# Altium PCB RPi_CWHUSKY_Target.PcbDoc (part 1 of 2)
Units mil, origin at the board's own origin, x right, y up, seen from the top; angles counter-clockwise.
Board outline 2623.51 x 2391.28 mil, 4 copper layers (Top Layer, Layer 1, Layer 2, Bottom Layer), stack 23.756 mil thick; 85 components, 89 nets, 390 pads, 172 vias.
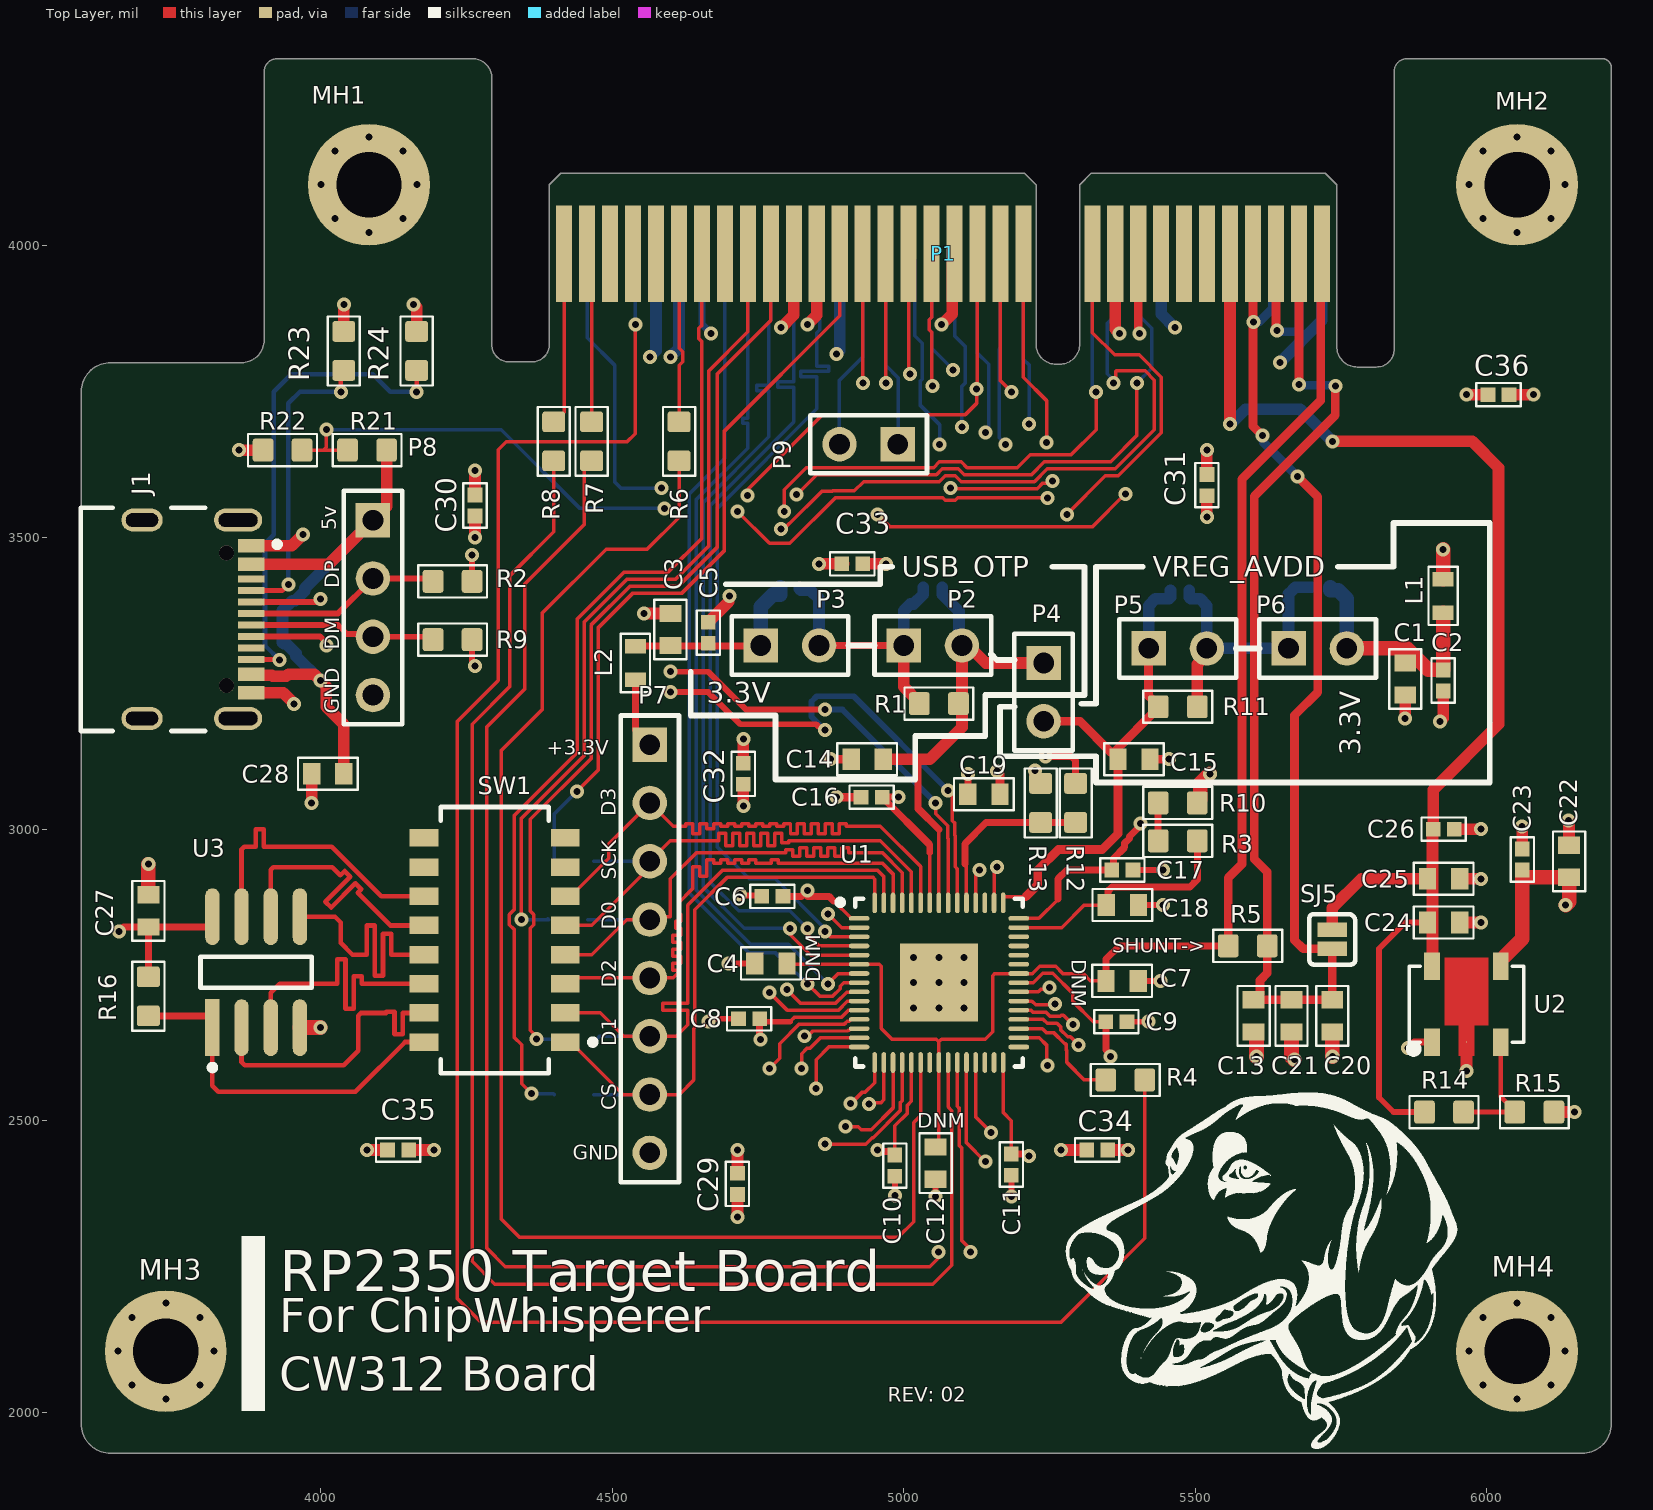
[diagram p0: Top Layer view]
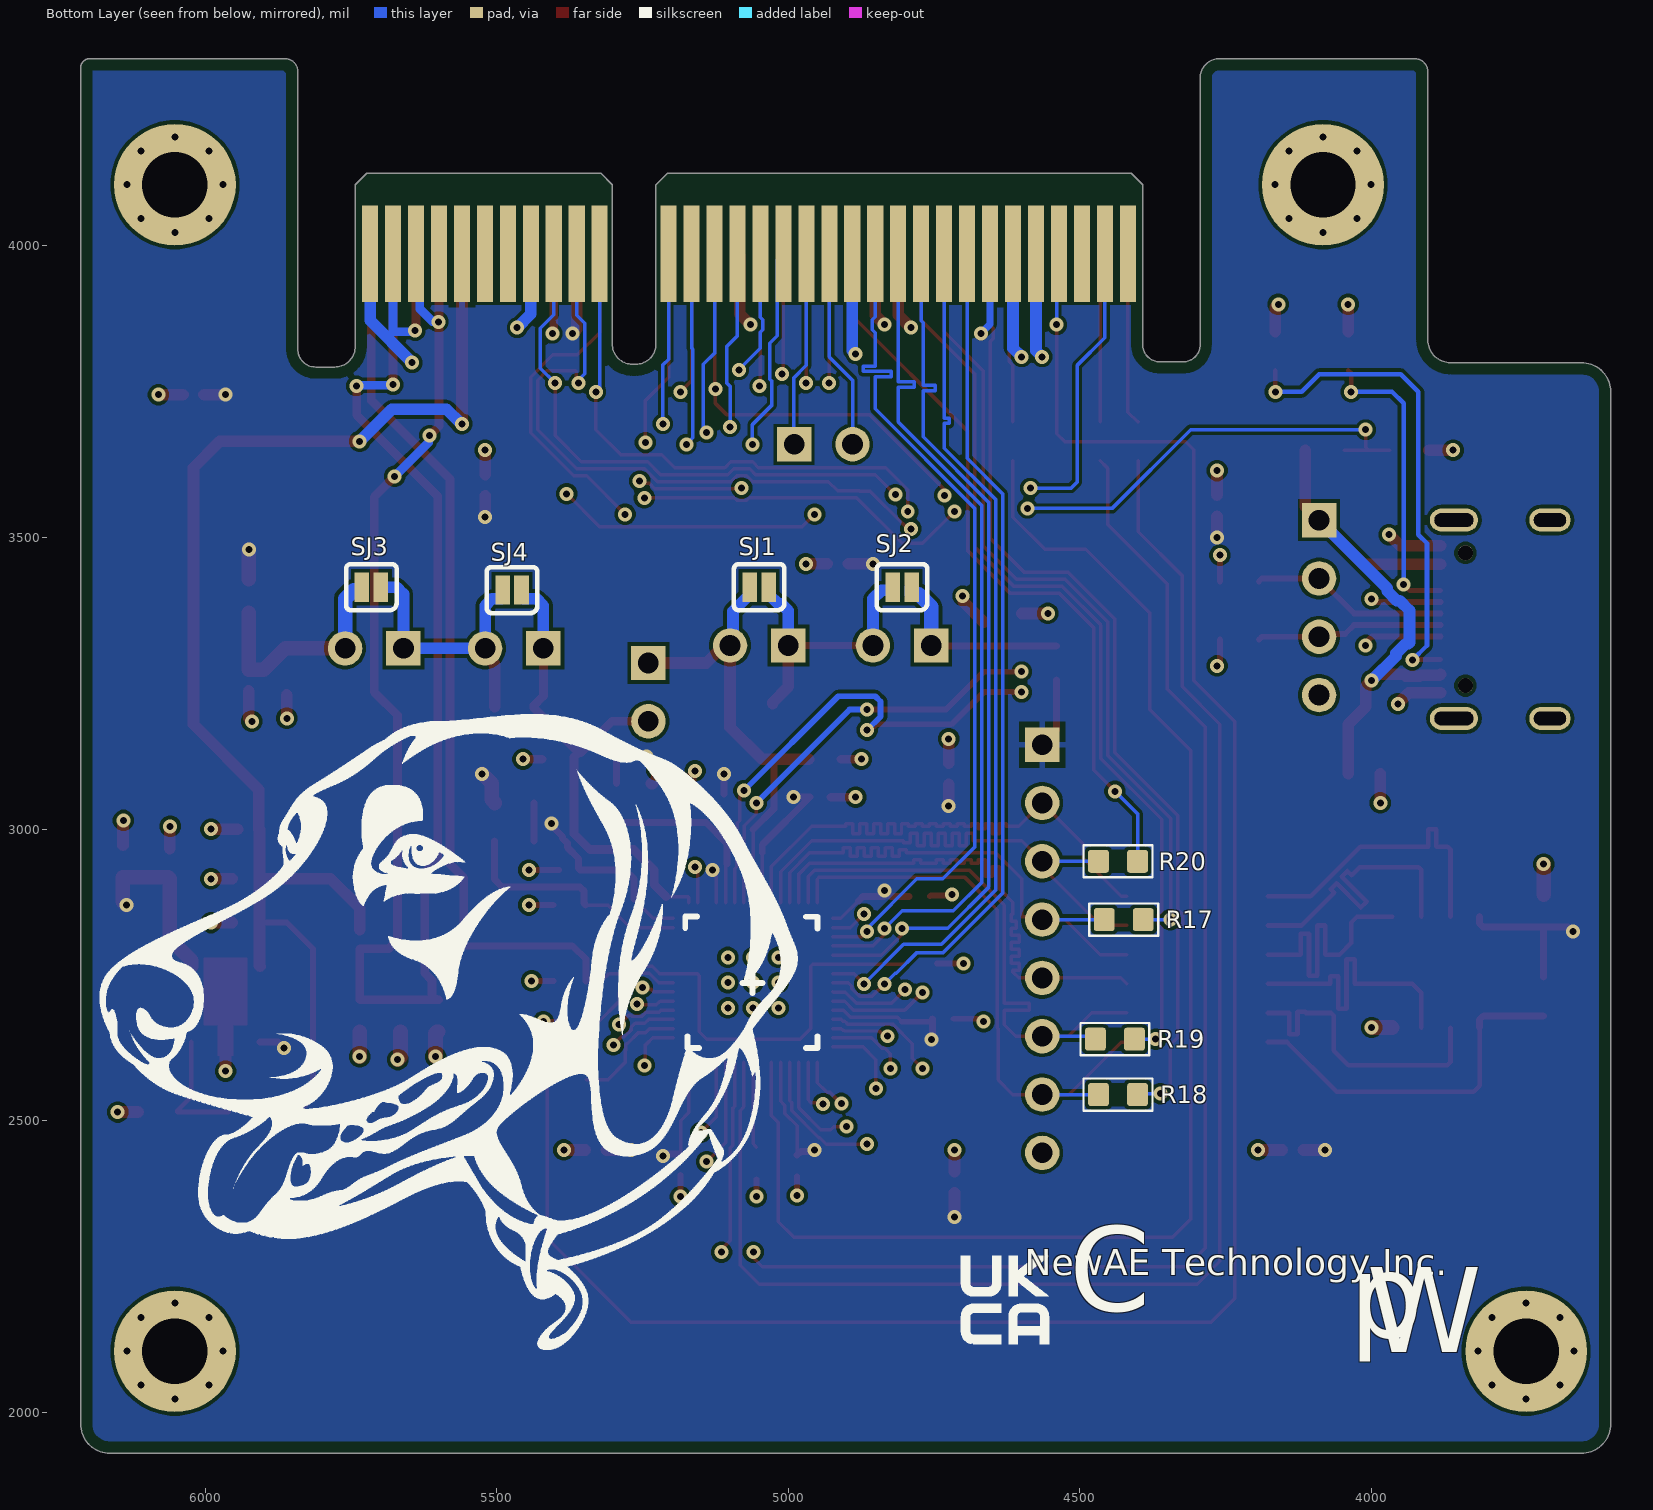
[diagram p1: Bottom Layer view, seen from below]
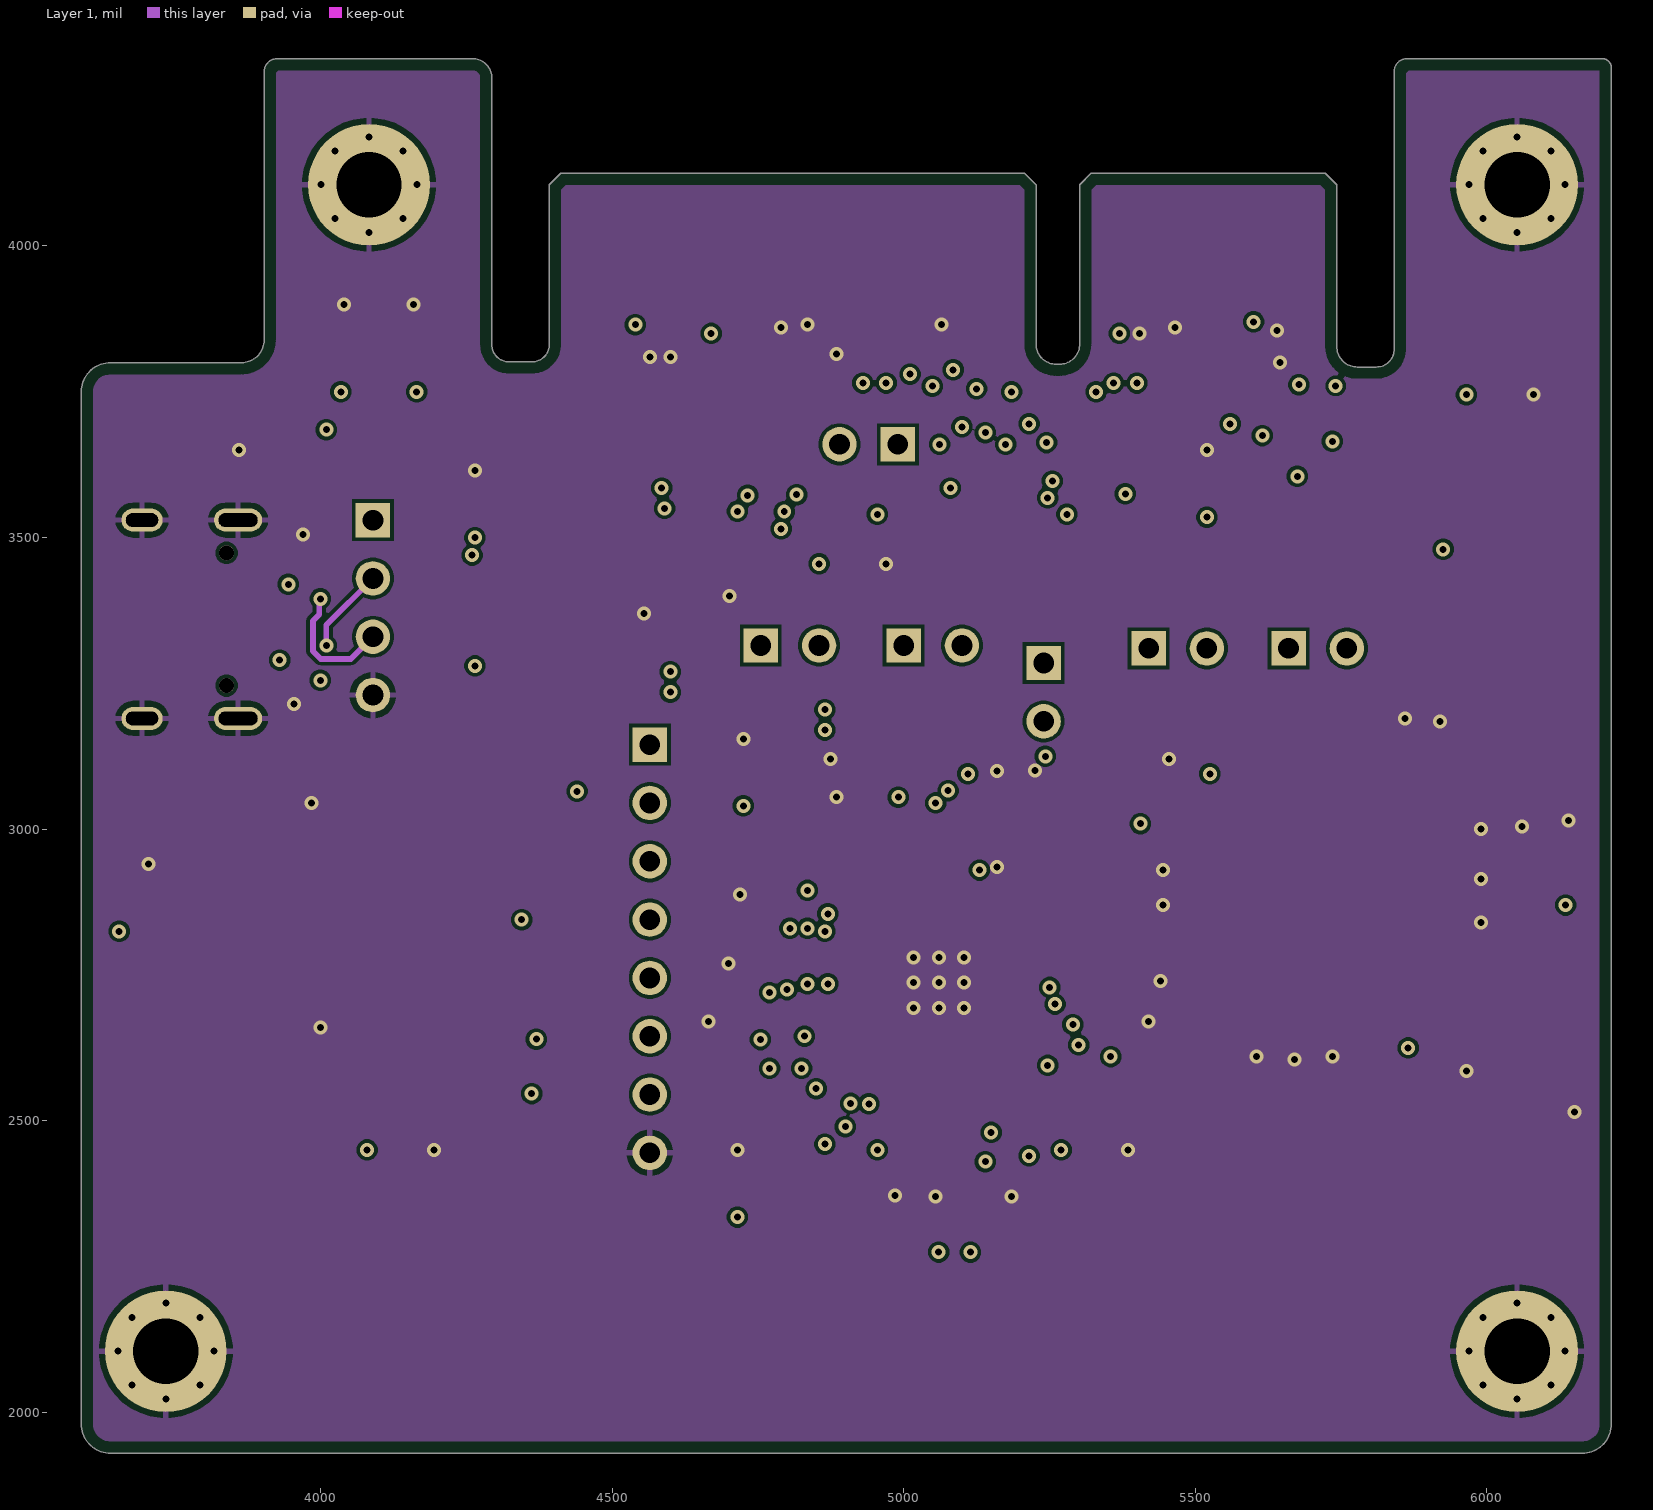
[diagram p2: Layer 1]
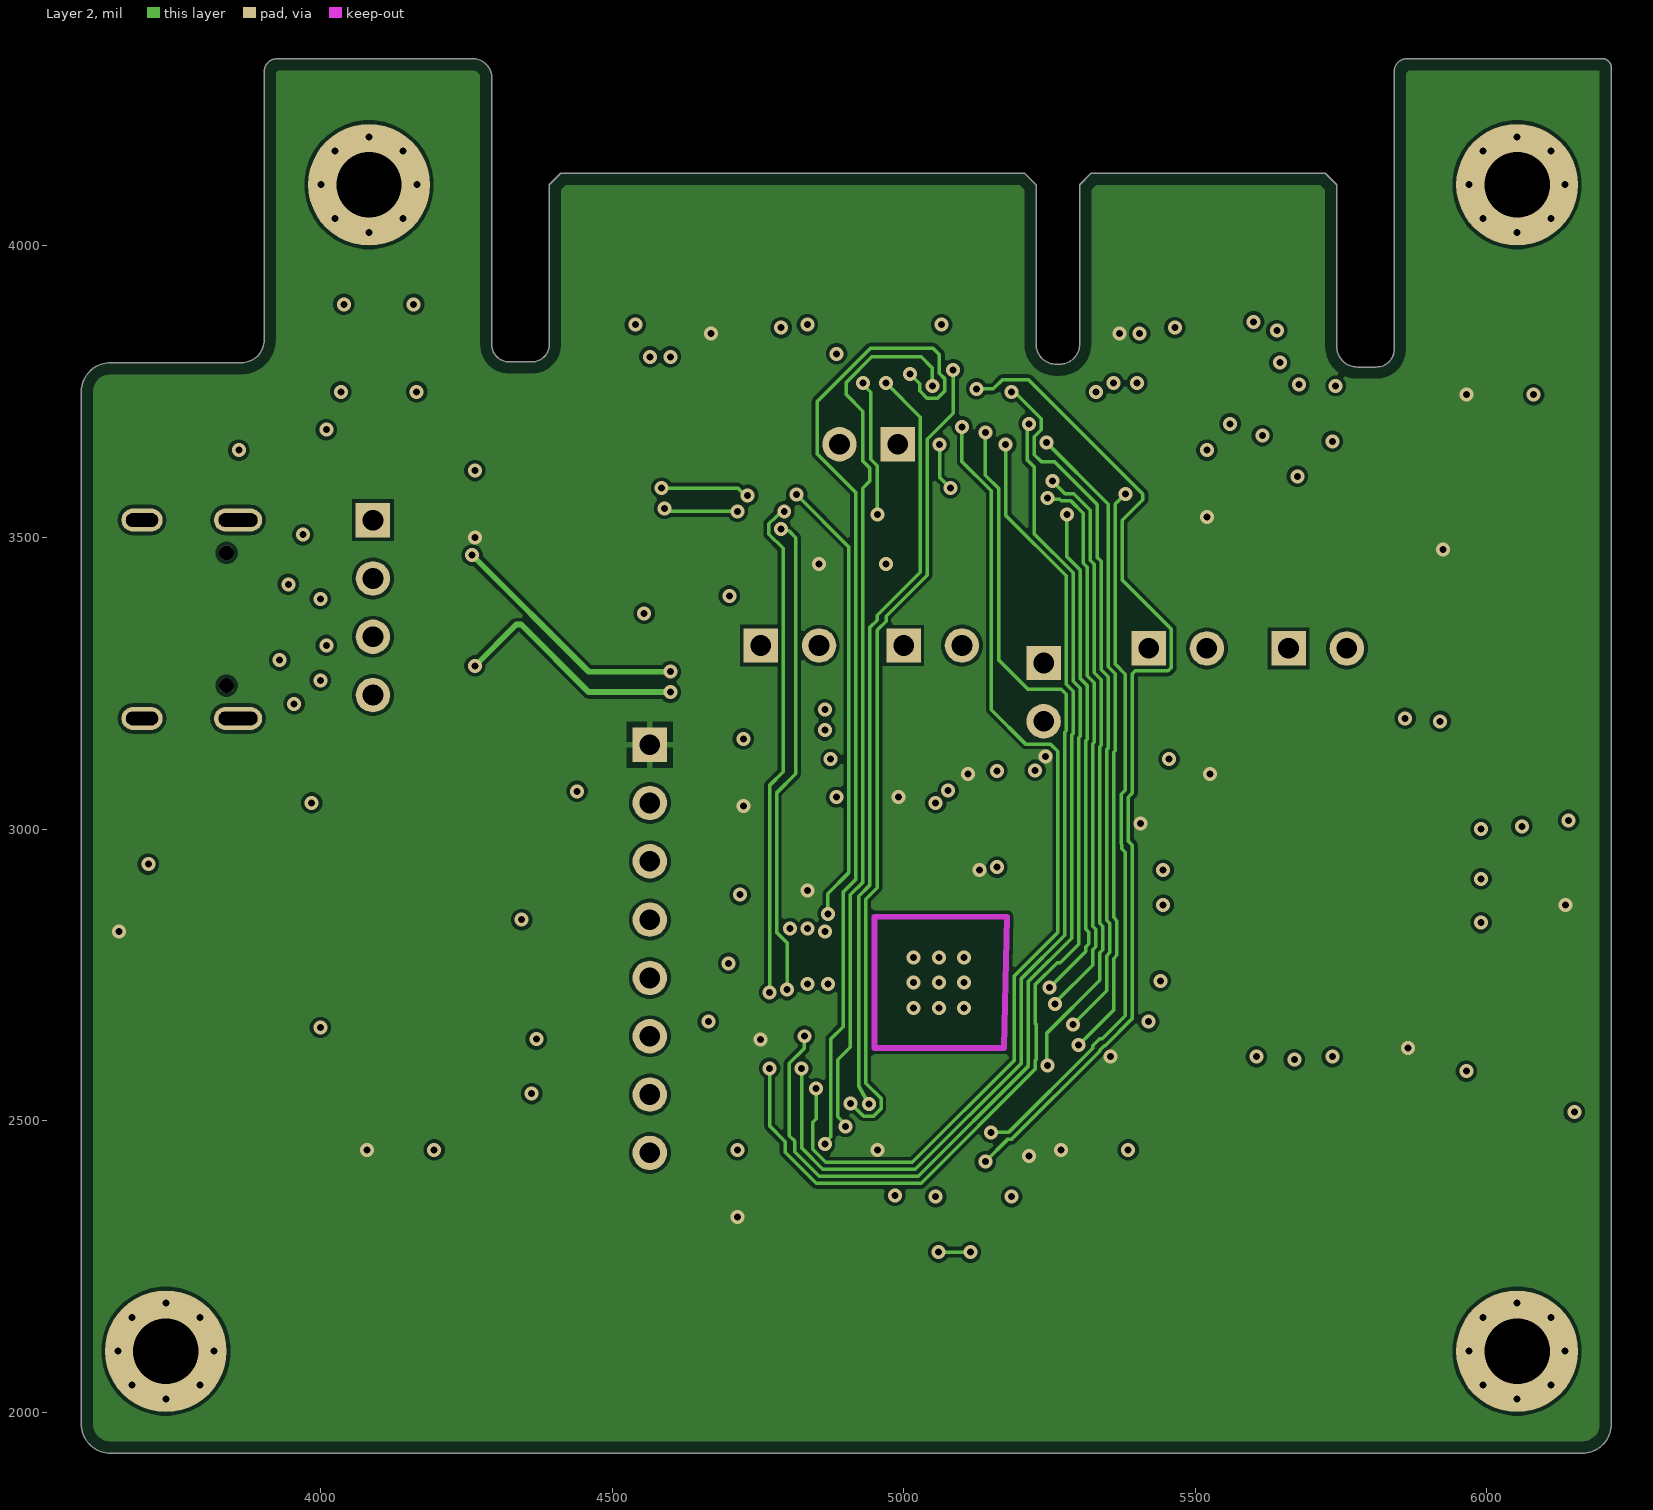
[diagram p3: Layer 2]
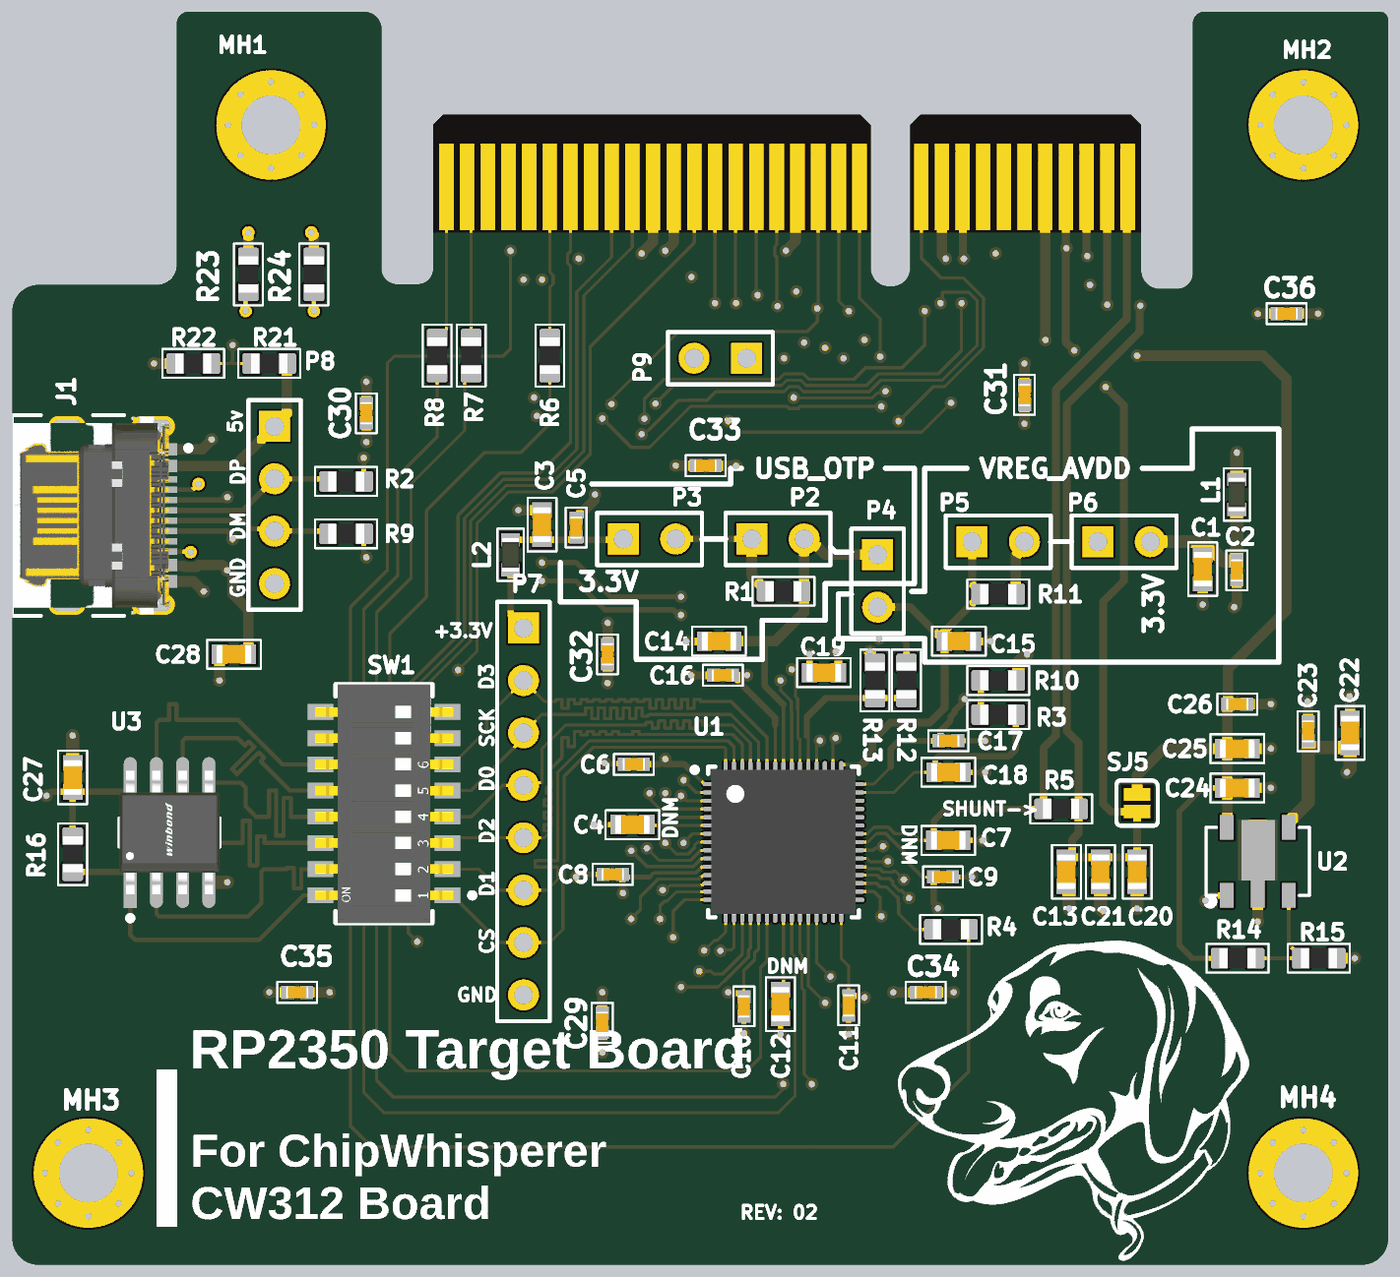
[diagram p5: 3D render of the assembled board from above, using the file's embedded part models]
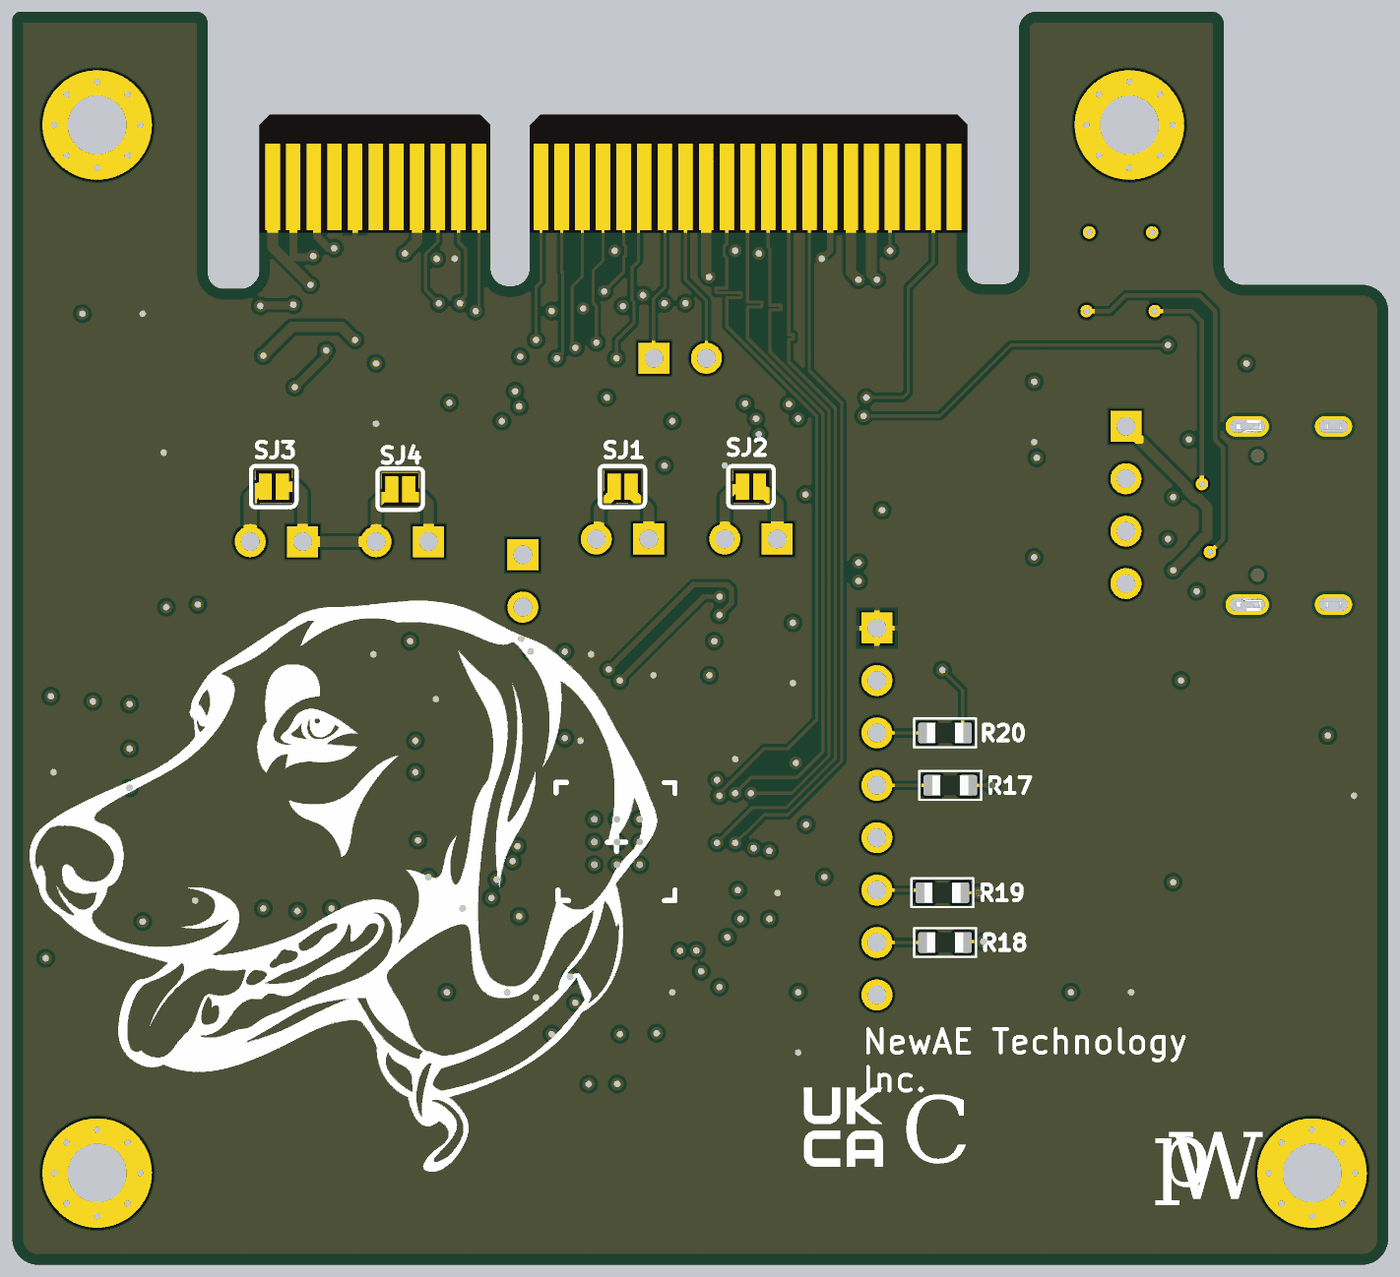
[diagram p6: 3D render of the assembled board from below, using the file's embedded part models]

## Layer stack, top to bottom
Top Solder: solder mask 0.4, Solder Resist, Dk 3.5
Top Layer: signal copper 1.4
Dielectric 2: prepreg 2.8, PP-006, Dk 4.1
Layer 1: signal copper 1.378
Dielectric 1: dielectric 12.6, FR-4, Dk 4.8
Layer 2: signal copper 1.378
Dielectric 3: prepreg 2.8, PP-006, Dk 4.1
Bottom Layer: signal copper 1.4
Bottom Solder: solder mask 0.4, Solder Resist, Dk 3.5

## Board outline
3590,1980 3590,3750 cw(c3640,3750) 3640,3800 3865,3800 ccw(c3865,3838.47) 3903.47,3838.47 3903.47,4298.64 cw(c3926.11,4298.64) 3926.11,4321.28 4260.75,4321.28 cw(c4260.75,4288.09) 4293.94,4288.09 4293.94,3830.52 ccw(c4323.02,3830.52) 4323.02,3801.44 4362.96,3801.44 ccw(c4362.96,3830.84) 4392.37,3830.84 4392.37,4105.09 4412.05,4124.78 5207.33,4124.78 5227.01,4105.09 5227.01,3831.47 ccw(c5261.04,3831.47) 5261.04,3797.44 5267.78,3797.44 ccw(c5267.78,3831.47) 5301.81,3831.47 5301.81,4105.09 5321.5,4124.78 5723.07,4124.78 5742.76,4105.09 5742.76,3827.46 ccw(c5777.78,3827.46) 5777.78,3792.44 5810.66,3792.44 ccw(c5810.66,3822.97) 5841.19,3822.97 5841.19,4299.35 cw(c5863.11,4299.35) 5863.11,4321.28 6197.76,4321.28 cw(c6197.76,4305.53) 6213.51,4305.53 6213.51,1980 cw(c6163.51,1980) 6163.51,1930 3640,1930 cw(c3640,1980)

## Design rules (kind name [scope] priority, off if disabled: settings)
BoardOutlineClearance Silk_to_Outline [(OnLayer('Top Overlay'))] p1: gap=0 ignorepadtopadclearanceinfootprint=FALSE
BoardOutlineClearance [All] p2: gap=20 ignorepadtopadclearanceinfootprint=FALSE except(5: Track-OutlineEdge Track-CavityEdge Track-CutoutEdge Track-SplitBarrior Track-SplitContinuation)
Clearance [All] p1: gap=6 ignorepadtopadclearanceinfootprint=FALSE except(0: Arc-Hole Track-Hole SMDPad-Hole THPad-Hole Via-Hole Fill-Hole Poly-Hole Region-Hole Text-Hole)
HoleSize [All] p1: absolutevalues=TRUE maxlimit=200 minlimit=1 maxpercent=80.000 minpercent=20.000
MatchedLengths MatchedLengths_beforedip [InNetClass('QSPIBeforeDIP')] p1: tolerance=10 checknetsindiffpair=FALSE checkdiffpairvsdiffpair=TRUE checkxsignals=TRUE checkothers=TRUE
MatchedLengths MatchedLengths_trace [InNetClass('trace')] p2: tolerance=10 checknetsindiffpair=FALSE checkdiffpairvsdiffpair=TRUE checkxsignals=TRUE checkothers=TRUE
MatchedLengths [InNetClass('QSpiAfterDIP')] p3: tolerance=50 checknetsindiffpair=FALSE checkdiffpairvsdiffpair=TRUE checkxsignals=TRUE checkothers=TRUE
MinimumSolderMaskSliver [All] p1: minsoldermaskwidth=5
PlaneConnect PlaneConnect_viaDirect [IsVia] p1: planeconnectstyle=Direct reliefexpansion=20 reliefentries=4 reliefconductorwidth=10 reliefairgap=10
PlaneConnect [All] p2: planeconnectstyle=Relief reliefexpansion=20 reliefentries=4 reliefconductorwidth=10 reliefairgap=10
PolygonConnect PolygonConnect_viaDirect [All vs isVia] p1: connectstyle=Direct reliefconductorwidth=10 reliefentries=4 polygonreliefangle="90 Angle" airgapwidth=10
PolygonConnect [All] p2: connectstyle=Relief reliefconductorwidth=10 reliefentries=4 polygonreliefangle="90 Angle" airgapwidth=10
RoutingVias [All] p1: holewidth=12 width=24 viastyle="Through Hole" minholewidth=12 minwidth=24 maxholewidth=28 maxwidth=50
SilkToSilkClearance [All] p1: silktosilkclearance=5
SilkToSolderMaskClearance [IsPad] p1: minsilkscreentomaskgap=5 clearancetoexposedcopper=TRUE
SolderMaskExpansion [All] p1: expansion=4 istentingtop=FALSE
Width [All] p1: maxlimit=100 minlimit=6 preferedwidth=8 midlayer1_maxwidth=10 midlayer2_maxwidth=10 minimp=50.000000 maximp=50.000000 favimp=50.000000
25 further rules are at their usual default settings.

## Classes and differential pairs
net class QSpiAfterDIP: NetR16_2 NetSW1_11 NetSW1_12 NetSW1_13 NetSW1_14 NetSW1_15
net class trace: TRACECLK TRACED0 TRACED1 TRACED2 TRACED3
net class QSPIBeforeDIP: QSPI_SCLK QSPI_SD0 QSPI_SD1 QSPI_SD2 QSPI_SD3 QSPI_SS
component class RP2350_QSPI: C27 P7 R16 R17 R18 R19 R20 SW1 U3
component class RP2350_Power: C22 C23 C24 C25 C26 C28 C29 C30 C31 C32 C33 C34 C35 C36 J1 P8 R14 R15 R21 R22 R23 R24 U2
component class RP2350_MCU: C1 C2 C3 C4 C5 C6 C7 C8 C9 C10 C11 C12 C14 C15 C16 C17 C18 C19 L1 L2 P2 P3 P4 P5 P6 R1 R2 R3 R9 R10 R11 R12 R13 SJ1 SJ2 SJ3 SJ4 U1
component class RP2350_CWHusky: C13 C20 C21 MH1 MH2 MH3 MH4 P1 P9 R4 R5 R6 R7 R8 SJ5

## Components (designator, comment, footprint, x,y, rotation, side; value= is the part's Value field where it differs from the comment)
C1 "2u2" CAPC0603_M 5860,3257.56 r270 top
C2 "100n" CAPC0402_M 5925,3255 r270 top
C3 "2u2" CAPC0603_M 4600,3342.44 r90 top
C4 "DNM" CAPC0603_M 4772.44,2770 r180 top
C5 "100n" CAPC0402_M 4665,3336.89 r90 top
C6 "100n" CAPC0402_M 4775,2885 r180 top
C7 "DNM" CAPC0603_M 5374.76,2740 r0 top
C8 "100n" CAPC0402_M 4735,2675 r180 top
C9 "100n" CAPC0402_M 5364.76,2670 r0 top
C10 "100n" CAPC0402_M 4985,2423.11 r270 top
C11 "100n" CAPC0402_M 5184.76,2425 r270 top
C12 "DNM" CAPC0603_M 5054.76,2427.44 r270 top
C13 "2u2" CAPC0603_M 5600,2680 r270 top
C14 "DNM" CAPC0603_M 4937.56,3120 r180 top
C15 "DNM" CAPC0603_M 5395,3120 r0 top
C16 "100n" CAPC0402_M 4945,3055 r180 top
C17 "100n" CAPC0402_M 5375,2930 r0 top
C18 "2u2" CAPC0603_M 5375,2870 r0 top
C19 "2u2" CAPC0603_M 5137.56,3060 r0 top
C20 "100n" CAPC0603_M 5735,2680 r270 top
C21 "100n" CAPC0603_M 5665,2680 r270 top
C22 "2u2" CAPC0603_M 6140.94,2945 r90 top
C23 "100n" CAPC0402_M 6060.94,2948.11 r90 top
C24 "2u2" CAPC0603_M 5925.94,2840 r0 top
C25 "2u2" CAPC0603_M 5925.94,2915 r0 top
C26 "100n" CAPC0402_M 5925.94,3000 r0 top
C27 "100n" CAPC0603_M 3705,2860 r90 top
C28 "2u2" CAPC0603_M 4012.56,3095 r180 top
C29 "100n" CAPC0402_M 4715,2391.89 r90 top
C30 "100n" CAPC0402_M 4265,3555 r90 top
C31 "100n" CAPC0402_M 5520,3590 r90 top
C32 "100n" CAPC0402_M 4725,3095 r90 top
C33 "100n" CAPC0402_M 4911.89,3455 r0 top
C34 "100n" CAPC0402_M 5331.89,2450 r0 top
C35 "100n" CAPC0402_M 4133.11,2450 r0 top
C36 "100n" CAPC0402_M 6020,3745 r0 top
J1 "USB4105-GF-A" FP-USB4105-GF-A-MFG 3740,3360 r270 top
L1 "1k @ 1Mhz" IND_0603 5925,3400 r90 top
L2 "1k @ 1Mhz" IND_0603 4540,3285 r90 top
MH1 "4-40 MH, Tight Fit" MOUNT_#4_TIGHT 4083.31,4105.09 r0 top
MH2 "4-40 MH, Tight Fit" MOUNT_#4_TIGHT 6051.81,4105.09 r0 top
MH3 "4-40 MH, Tight Fit" MOUNT_#4_TIGHT 3735,2105 r0 top
MH4 "4-40 MH, Tight Fit" MOUNT_#4_TIGHT 6051.81,2105 r0 top
P1 "PCIeX4-GF-2D-1000-1K-O64" PCIeX4-GF-2D-1000-1K-O64 5343.15,3986.98 r180 top
P2 "Header 2" HDR1X2 5000,3315 r0 top
P3 "Header 2" HDR1X2 4755,3315 r0 top
P4 "Header 2" HDR1X2 5240,3285 r270 top
P5 "Header 2" HDR1X2 5420,3310 r0 top
P6 "Header 2" HDR1X2 5660,3310 r0 top
P7 "Header 8" HDR1X8 4564.76,3145 r270 top
P8 "Header 4" HDR1X4 4090,3530 r270 top
P9 "Header 2" HDR1X2 4990,3660 r180 top
R1 "10R" RESC1608X55N 5060.51,3215.26 r0 top
R2 "27R" RESC1608X55N 4226.54,3425 r180 top
R3 "1R" RESC1608X55N 5470,2980 r180 top value=10R
R4 "10R" RESC1608X55N 5380,2570 r180 top
R5 "10R" RESC1608X55N 5590,2800 r180 top
R6 "10R" RESC1608X55N 4615,3665 r90 top
R7 "100R" RESC1608X55N 4465,3665 r90 top
R8 "100R" RESC1608X55N 4400,3665 r90 top
R9 "27R" RESC1608X55N 4226.54,3325 r180 top
R10 "200R" RESC1608X55N 5470,3045 r180 top
R11 "10R" RESC1608X55N 5470,3210 r0 top
R12 "5k6" RESC1608X55N 5295,3045 r270 top
R13 "3k3" RESC1608X55N 5235,3045 r90 top
R14 "5k6" RESC1608X55N 5926.54,2515 r0 top
R15 "15k" RESC1608X55N 6081.54,2515 r0 top
R16 "1k" RESC1608X55N 3705,2713.46 r270 top
R17 "DNM RCHIP" RESC1608X55N 4425,2845 r180 bottom
R18 "DNM RCHIP" RESC1608X55N 4434.76,2545 r0 bottom
R19 "DNM RCHIP" RESC1608X55N 4440,2640 r180 bottom
R20 "DNM RCHIP" RESC1608X55N 4434.76,2945 r0 bottom
R21 "5k6" RESC1608X55N 4080,3650 r180 top
R22 "10k" RESC1608X55N 3935,3650 r180 top
R23 "5k1" RESC1608X55N 4040,3820 r90 top
R24 "5k1" RESC1608X55N 4165,3820 r90 top
SJ1 "NO" SJ_2S_NO 5050,3415 r0 bottom
SJ2 "NO" SJ_2S_NO 4805,3415 r0 bottom
SJ3 "NO" SJ_2S_NO 5715,3415 r0 bottom
SJ4 "NO" SJ_2S_NO 5473.78,3410 r0 bottom
SJ5 "NO" SJ_2S_NO 5735,2811.22 r270 top
SW1 "A6H-8101-PM" FP-A6H-8101-PM-MFG 4298.7,2810 r90 top
U1 "AMETHYST 7x7" QFN60P700X700X85_HS-61M 5060.51,2736.81 r0 top
U2 "AP7361C-Y5-13" SOT89-5 5905.94,2635 r0 top
U3 "W25Q16JVSNIQ TR" FP-W25Q16JVSNIQ_TR-IPC_A 3889.76,2754.88 r90 top

## Footprints (in the part's own frame and the unit in brackets; to place one, negate y for a bottom-side part, rotate by r counter-clockwise, add the part's x,y. Pads: shape width x height; smd on the part's side, far side on the other; paste and mask are expansions set on the pad)
CAPC0402_M [mm] "Chip Capacitor, 2-Leads, Body 0402, IPC Medium Density"
  rect 0.64x0.64 smd mask+0.06: 1(-0.46,0) 2(0.46,0)
  silkscreen extent -0.97,-0.51 0.97,0.51, body extent -0.55,-0.3 0.55,0.3, height 0.6
CAPC0603_M [mm]
  rect 0.75x0.95 smd: 1(-0.7,0) 2(0.7,0)
  silkscreen extent -1.3,-0.7 1.3,0.7, body extent -0.85,-0.45 0.85,0.45, height 0.9
FP-A6H-8101-PM-MFG [mm]
  rect 0.76x1.25 smd paste+0 mask+0: 1(-4.445,-3.075) 2(-3.175,-3.075) 3(-1.905,-3.075) 4(-0.635,-3.075) 5(0.635,-3.075) 6(1.905,-3.075) 7(3.175,-3.075) 8(4.445,-3.075) 9(4.445,3.075) 10(3.175,3.075) 11(1.905,3.075) 12(0.635,3.075) 13(-0.635,3.075) 14(-1.905,3.075) 15(-3.175,3.075) 16(-4.445,3.075)
  silkscreen extent -5.79,-4.4 5.79,2.35, body extent -5.89,-3.8 5.89,3.8, height 0.25
FP-USB4105-GF-A-MFG [mm]
  rrect100% 1x2.1 hole 1.7 slot 0.6 at 0 deg paste-2539.97 mask+0: 1(-4.32,3.015) 2(4.32,3.015)
  rrect100% 1x1.8 hole 1.4 slot 0.6 at 0 deg paste-2539.97 mask+0: 3(-4.32,-1.165) 4(4.32,-1.165)
  rect 0.6x1.15 smd paste+0 mask+0: A1-B12(-3.2,3.59) A4-B9(-2.4,3.59) B1-A12(3.2,3.59) B4-A9(2.4,3.59)
  rect 0.3x1.15 smd paste+0 mask+0: A5(-1.25,3.59) A6(-0.25,3.59) A7(0.25,3.59) A8(1.25,3.59) B5(1.75,3.59) B6(0.75,3.59) B7(-0.75,3.59) B8(-1.75,3.59)
  round 0.65 hole 0.65 unplated paste-2539.97 mask+0: ""(-2.89,2.515) ""(2.89,2.515)
  silkscreen extent -4.86,-3.84 4.86,4.84, body extent -4.96,-3.94 4.96,4.27, height 0.25
FP-W25Q16JVSNIQ_TR-IPC_A [mil]
  rect 97.4x24.54 smd paste+0 mask+0: 1(-95.12,75)
  rrect100% 97.4x24.54 smd paste+0 mask+0: 2(-95.12,25) 3(-95.12,-25) 4(-95.12,-75) 5(95.12,-75) 6(95.12,-25) 7(95.12,25) 8(95.12,75)
  silkscreen extent -168,-95 27,95, body extent -164,-115 164,115, height 10
HDR1X2 [mm] "Connector; Header; 2 Position"
  rect 1.5x1.5 hole 0.9: 1(0,0)
  round 1.5 hole 0.9: 2(2.54,0)
  silkscreen extent -1.27,-1.27 3.81,1.27
HDR1X4 [mm] "Connector; Header; 4 Position"
  rect 1.5x1.5 hole 0.9: 1(0,0)
  round 1.5 hole 0.9: 2(2.54,0) 3(5.08,0) 4(7.62,0)
  silkscreen extent -1.27,-1.27 8.89,1.27
HDR1X8 [mm] "Connector; Header; 8 Position"
  rect 1.5x1.5 hole 0.9: 1(0,0)
  round 1.5 hole 0.9: 2(2.54,0) 3(5.08,0) 4(7.62,0) 5(10.16,0) 6(12.7,0) 7(15.24,0) 8(17.78,0)
  silkscreen extent -1.27,-1.27 19.05,1.27
IND_0603 [mm] "Chip Inductor, 2-Leads, Body 1.60x0.80mm, IPC Medium Density"
  rect 0.64x0.92 smd: 1(-0.73,0) 2(0.73,0)
  Top Layer pour cut-out: -0.686,0.457 0.838,0.457 0.838,-0.457 -0.686,-0.457
  silkscreen extent -1.27,-0.64 1.27,0.64, body extent -0.82,-0.43 0.82,0.43, height 0.9
MOUNT_#4_TIGHT [mil]
  round 14 hole 12: 1(-82.21,0) 1(-58.13,-58.13) 1(-58.13,58.13) 1(0,-82.21) 1(0,82.21) 1(58.13,-58.13) 1(58.13,58.13) 1(82.21,0)
  round 208.66 hole 112.2: 1(0,0)
PCIeX4-GF-2D-1000-1K-O64 [mm] "Golden finger, PCIeX4, Dual, Opposite, Pitch 1mm, 64-Position"
  rect 0.7x4.2 smd far side paste-1: A1(-9.5,0) A2(-8.5,0) A3(-7.5,0) A4(-6.5,0) A5(-5.5,0) A6(-4.5,0) A7(-3.5,0) A8(-2.5,0) A9(-1.5,0) A10(-0.5,0) A11(0.5,0) A12(3.5,0) A13(4.5,0) A14(5.5,0) A15(6.5,0) A16(7.5,0) A17(8.5,0) A18(9.5,0) A19(10.5,0) A20(11.5,0) A21(12.5,0) A22(13.5,0) A23(14.5,0) A24(15.5,0) A25(16.5,0) A26(17.5,0) A27(18.5,0) A28(19.5,0) A29(20.5,0) A30(21.5,0) A31(22.5,0) A32(23.5,0)
  rect 0.7x4.2 smd paste-1: B1(-9.5,0) B2(-8.5,0) B3(-7.5,0) B4(-6.5,0) B5(-5.5,0) B6(-4.5,0) B7(-3.5,0) B8(-2.5,0) B9(-1.5,0) B10(-0.5,0) B11(0.5,0) B12(3.5,0) B13(4.5,0) B14(5.5,0) B15(6.5,0) B16(7.5,0) B17(8.5,0) B18(9.5,0) B19(10.5,0) B20(11.5,0) B21(12.5,0) B22(13.5,0) B23(14.5,0) B24(15.5,0) B25(16.5,0) B26(17.5,0) B27(18.5,0) B28(19.5,0) B29(20.5,0) B30(21.5,0) B31(22.5,0) B32(23.5,0)
QFN60P700X700X85_HS-61M [mm] "QFN, 60-Leads, Body 7.00x7.00mm, Pitch 0.40mm, Thermal Pad 3.40x3.40mm, IPC Low Density"
  oval 0.9x0.2 smd: 1(-3.475,2.8) 2(-3.475,2.4) 3(-3.475,2) 4(-3.475,1.6) 5(-3.475,1.2) 6(-3.475,0.8) 7(-3.475,0.4) 8(-3.475,0) 9(-3.475,-0.4) 10(-3.475,-0.8) 11(-3.475,-1.2) 12(-3.475,-1.6) 13(-3.475,-2) 14(-3.475,-2.4) 15(-3.475,-2.8) 31(3.475,-2.8) 32(3.475,-2.4) 33(3.475,-2) 34(3.475,-1.6) 35(3.475,-1.2) 36(3.475,-0.8) 37(3.475,-0.4) 38(3.475,0) 39(3.475,0.4) 40(3.475,0.8) 41(3.475,1.2) 42(3.475,1.6) 43(3.475,2) 44(3.475,2.4) 45(3.475,2.8)
  oval 0.2x0.9 smd: 16(-2.8,-3.475) 17(-2.4,-3.475) 18(-2,-3.475) 19(-1.6,-3.475) 20(-1.2,-3.475) 21(-0.8,-3.475) 22(-0.4,-3.475) 23(0,-3.475) 24(0.4,-3.475) 25(0.8,-3.475) 26(1.2,-3.475) 27(1.6,-3.475) 28(2,-3.475) 29(2.4,-3.475) 30(2.8,-3.475) 46(2.8,3.475) 47(2.4,3.475) 48(2,3.475) 49(1.6,3.475) 50(1.2,3.475) 51(0.8,3.475) 52(0.4,3.475) 53(0,3.475) 54(-0.4,3.475) 55(-0.8,3.475) 56(-1.2,3.475) 57(-1.6,3.475) 58(-2,3.475) 59(-2.4,3.475) 60(-2.8,3.475)
  rect 3.4x3.4 smd: 61(0,0)
  silkscreen extent -4.42,-3.65 3.65,3.65, body extent -3.5,-3.5 3.5,3.5, height 0.85
RESC1608X55N [mm] "Chip Resistor, Body 1.6x0.8mm, EIA 0603, IPC Medium Density"
  round 0.254 on Mech15: 0(0,0)
  rrect25% 0.9x1 smd: 1(-0.85,0) 2(0.85,0)
  Top Layer pour cut-out: -0.6,0.5 0.6,0.5 0.6,-0.5 -0.6,-0.5
  silkscreen extent -1.5,-0.7 1.5,0.7, body extent -0.87,-0.47 0.88,0.48, height 0.54
SJ_2S_NO [mil] "Solder Jumper, open (no paste)"
  rect 25x50 smd paste-393.7: 1(-16.22,0) 2(16.22,0)
  silkscreen extent -43,-39 43,39
SOT89-5 [mm]
  rect 0.68x1.2 smd: 1(0,0) 3(3,0) 4(3,3.3) 5(0,3.3)
  round 0.025 smd: 2(1.5,0)
  Top Layer region: 0.55,0.725 2.45,0.725 2.45,3.675 0.55,3.675
  Top Layer region: 1.16,-0.6 1.16,3.65 1.84,3.65 1.84,-0.6
  silkscreen extent -1,-0.44 4,3.3

## Part data
C1 C3 C13 C18 C19 C22 C24 C25 C28: library part CCHIP-2u2-0603, "2u2, 0603", Case-EIA=0603, Case-Metric=1608, Manufacture 1=Samsung, Manufacture Part Number 1=CL10B225KP8NNNC, Rated Voltage=10VDC, Supplier Part Number 1=1276-1134-1-ND, Component Group=Capacitor, Component Type=Standard, Mounting Technology=SMT, Part Number=CCHIP-2u2-0603, Pin Count=2, Supplier 1=Digi-Key
C2 C5 C6 C8 C9 C10 C11 C16 C17 C23 C26 C29 C30 C31 C32 C33 C34 C35 C36: library part CCHIP-100n-0402, "100n, 0402", Case-EIA=0402, Manufacture Part Number 1=CGA2B3X7R1V104K050BB, Supplier Part Number 1=445-6901-1-ND, Component Group=Capacitor, Component Type=Standard, Mounting Technology=SMT, Part Number=CCHIP-100n-0402, Pin Count=2, Supplier 1=Digi-Key
C4 C7 C12 C14 C15: library part CCHIP-DNM-0603, "DNM, 0603", Case-EIA=0603, Component Group=Capacitor, Component Type=Standard, Mounting Technology=SMT, Part Number=CCHIP-DNM-0603, Pin Count=2
C20 C21 C27: library part CCHIP-100n-0603, "100n, 0603", Case-EIA=0603, Case-Metric=1608, Manufacture 1=Kemet, Manufacture Part Number 1=C0603C104K5RACTU, Rated Voltage=50VDC, Supplier Part Number 1=399-5089-2-ND, Component Group=Capacitor, Component Type=Standard, Mounting Technology=SMT, Part Number=CCHIP-100n-0603, Pin Count=2, Supplier 1=Digi-Key
J1: library part CMP-245163-000001-1, "CONN RCPT USB2.0 TYPEC 5A", Current Rating=5/6.25/1.25/0.25A, Manufacturer=GCT, Package=0, Temperature="-40°C to +85°C", Temperature Range High=+85°C, Temperature Range Low=-40°C, Voltage Rating=20V, Automotive=No, Category=Conn, ComponentLink2Description=Datasheet, ComponentLink2URL=https://gct.co/files/drawings/usb4105.pdf, Conn Orientation="Right Angle", Contact Material=Gold,Nickel, Device Class L1=Connectors, Device Class L2="USB Connectors", Device Class L3=unset, Digikey Description="CONN RCPT USB2.0 TYPEC 5A", Height=3.46mm, Is Female=yes, Lead Free=Yes, Manufacturer Part Number=USB4105-GF-A, Number of Contacts=16, Octopart=https://octopart.com/usb4105-gf-a-gct-106627878, RoHS=TRUE, Usb Standard="USB 2.0"
L1 L2: library part FBCHIP-1k-0603, "Ferrite Beads HI CUR CHIP BD 0603 1000OHMS 25%", Manufacture 1="Taiyo Yuden", Manufacture Part Number 1="FBMH1608HM102-T / FBMH1608HM102-T / FBMH1608HM102-T / FBMH1608HM102-T", Supplier Part Number 1=963-FBMH1608HM102-T, Component Group=Inductor, Component Type=Standard, Mounting Technology=SMT, Part Number=FBCHIP-1k-0603, Pin Count=2, PP Material Stack=0, PP Rotation=0, RoHS=Yes, Supplier 1=Mouser
MH1 MH2 MH3 MH4: library part MOUNT_#4_TIGHT, "Machine screw 4-40 Mounting Hole", Component Group=Mechanical, Component Type=Mechanical, Part Number=MOUNT_#4_TIGHT, Pin Count=1, PP Material Stack=0, PP Rotation=0
P1: library part CMP-0001-00031-2, "Golden finger, PCIeX4, Dual, Opposite, Pitch 1mm, 64-Position", ClassName="Edge Connector", Datasheet Version="rev2.0, Apr-2007", Mating Connector=Molex-87715-9106, Package Reference=PCIeX4-GF-2D-1000-1K-O64, Publisher=Altium
P2 P3 P4 P5 P6 P9: "Header, 2-Pin", LatestRevisionDate=17-Jul-2002, LatestRevisionNote="Re-released for DXP Platform.", Publisher="Altium Limited"
P7: "Header, 8-Pin", LatestRevisionDate=17-Jul-2002, LatestRevisionNote="Re-released for DXP Platform.", Publisher="Altium Limited"
P8: "Header, 4-Pin", LatestRevisionDate=17-Jul-2002, LatestRevisionNote="Re-released for DXP Platform.", Publisher="Altium Limited"
R1 R4 R5 R6 R11: library part RCHIP-10R-0603, "10R res, 0603, 1%, 1/10W", Case-EIA=0603, Case-Metric=1608, Manufacture 1=Yageo, Manufacture Part Number 1=RC0603FR-0710RL, Rated Power=0.1W, Rated Voltage=75VDC, Supplier Part Number 1=311-10.0HRCT-ND, Temperature Range="-55C to 155C", Tolerance=1%, Component Group=Resistor, Component Type=Standard, Mounting Technology=SMT, Part Number=RCHIP-10R-0603, Pin Count=2, Supplier 1=Digi-Key
R2 R9: library part RCHIP-27R-0603, "27R res, 0603, 1%, 1/10W", Case-EIA=0603, Case-Metric=1608, Manufacture 1=Yageo, Manufacture Part Number 1=RC0603FR-0727RL, Rated Power=0.1W, Rated Voltage=75VDC, Supplier Part Number 1=311-27.0HRCT-ND, Temperature Range="-55C to 155C", Tolerance=1%, Component Group=Resistor, Component Type=Standard, Mounting Technology=SMT, Part Number=RCHIP-27R-0603, Pin Count=2, Supplier 1=Digi-Key
R3: library part RCHIP-10R-0603, "1R res, 0603, 1%, 1/10W", Case-EIA=0603, Case-Metric=1608, Manufacture 1=Yageo, Manufacture Part Number 1=RC0603FR-0710RL, Rated Power=0.1W, Rated Voltage=75VDC, Supplier Part Number 1=311-10.0HRCT-ND, Temperature Range="-55C to 155C", Tolerance=1%, Component Group=Resistor, Component Type=Standard, Mounting Technology=SMT, Part Number=RCHIP-10R-0603, Pin Count=2, Supplier 1=Digi-Key
R7 R8: library part RCHIP-100R-0603, "100R res, 0603, 1%, 1/10W", Case-EIA=0603, Case-Metric=1608, Manufacture 1=Yageo, Manufacture Part Number 1=RC0603FR-07100RL, Rated Power=0.1W, Rated Voltage=75VDC, Supplier Part Number 1=311-100HRCT-ND, Temperature Range="-55C to 155C", Tolerance=1%, Component Group=Resistor, Component Type=Standard, Mounting Technology=SMT, Part Number=RCHIP-100R-0603, Pin Count=2, Supplier 1=Digi-Key
R10: library part RCHIP-200R-0603, "200R res, 0603, 1%, 1/10W", Case-EIA=0603, Case-Metric=1608, Manufacture 1=Yageo, Manufacture Part Number 1=RC0603FR-07200RL, Rated Power=0.1W, Rated Voltage=75VDC, Supplier Part Number 1=311-200HRCT-ND, Temperature Range="-55C to 155C", Tolerance=1%, Component Group=Resistor, Component Type=Standard, Mounting Technology=SMT, Part Number=RCHIP-200R-0603, Pin Count=2, Supplier 1=Digi-Key
R12: library part RCHIP-5k6-0603, "5k6 res, 0603, 1%, 1/10W", Case-EIA=0603, Case-Metric=1608, Manufacture 1=Yageo, Manufacture Part Number 1=RC0603FR-075K6L, Part Number=RCHIP-5K6-0603, Rated Power=0.1W, Rated Voltage=75VDC, Supplier Part Number 1=311-5.60KHRCT-ND, Temperature Range="-55C to 155C", Tolerance=1%, Component Group=Resistor, Component Type=Standard, Mounting Technology=SMT, Pin Count=2, Supplier 1=Digi-Key
R13: library part RCHIP-3k3-0603, "3k3 res, 0603, 1%, 1/10W", Case-EIA=0603, Case-Metric=1608, Manufacture 1=Yageo, Manufacture Part Number 1=RC0603FR-073K3L, Part Number=RCHIP-3K3-0603, Rated Power=0.1W, Rated Voltage=75VDC, Supplier Part Number 1=311-3.30KHRCT-ND, Temperature Range="-55C to 155C", Tolerance=1%, Component Group=Resistor, Component Type=Standard, Mounting Technology=SMT, Pin Count=2, Supplier 1=Digi-Key
R14 R21: library part RCHIP-5K6-0603, "5k6 res, 0603, 1%, 1/10W", Case-EIA=0603, Case-Metric=1608, Manufacture 1=Yageo, Manufacture Part Number 1=RC0603FR-075K6L, Rated Power=0.1W, Rated Voltage=75VDC, Supplier Part Number 1=311-5.60KHRCT-ND, Temperature Range="-55C to 155C", Tolerance=1%, Component Group=Resistor, Component Type=Standard, Mounting Technology=SMT, Part Number=RCHIP-5K6-0603, Pin Count=2, Supplier 1=Digi-Key
R15: library part RCHIP-15k-0603, "15k res, 0603, 1%, 1/10W", Case-EIA=0603, Case-Metric=1608, Manufacture 1=Yageo, Manufacture Part Number 1=RC0603FR-0715KL, Part Number=RCHIP-15K-0603, Rated Power=0.1W, Rated Voltage=75VDC, Supplier Part Number 1=311-15.0KHRCT-ND, Temperature Range="-55C to 155C", Tolerance=1%, Component Group=Resistor, Component Type=Standard, Mounting Technology=SMT, Pin Count=2, Supplier 1=Digi-Key
R16: library part RCHIP-1K-0603, "1k res, 0603, 1%, 1/10W", Case-EIA=0603, Case-Metric=1608, Manufacture 1=Yageo, Manufacture Part Number 1=RC0603FR-071KL, Rated Power=0.1W, Rated Voltage=75VDC, Supplier Part Number 1=311-1.00KHRCT-ND, Temperature Range="-55C to 155C", Tolerance=1%, Component Group=Resistor, Component Type=Standard, Mounting Technology=SMT, Part Number=RCHIP-1K-0603, Pin Count=2, Supplier 1=Digi-Key
R17 R18 R19 R20: library part RCHIP-DNM-0603, "Do Not Mount Resistor", Case-EIA=0603, Case-Metric=1608, Component Group=Resistor, Component Type=Standard, Mounting Technology=SMT, Part Number=RCHIP-DNM-0603, Pin Count=2
R22: library part RCHIP-10K-0603, "10k res, 0603, 1%, 1/10W", Case-EIA=0603, Case-Metric=1608, Manufacture 1=Yageo, Manufacture Part Number 1=RC0603FR-0710KL, Rated Power=0.1W, Rated Voltage=75VDC, Supplier Part Number 1=311-10.0KHRCT-ND, Temperature Range="-55C to 155C", Tolerance=1%, Component Group=Resistor, Component Type=Standard, Mounting Technology=SMT, Part Number=RCHIP-10K-0603, Pin Count=2, Supplier 1=Digi-Key
R23 R24: library part RCHIP-5K1-0603, "5k1 res, 0603, 1%, 1/10W", Case-EIA=0603, Case-Metric=1608, Manufacture 1=Yageo, Manufacture Part Number 1=RC0603FR-075K1L, Rated Power=0.1W, Rated Voltage=75VDC, Supplier Part Number 1=311-5.10KHRCT-ND, Temperature Range="-55C to 155C", Tolerance=1%, Component Group=Resistor, Component Type=Standard, Mounting Technology=SMT, Part Number=RCHIP-5K1-0603, Pin Count=2, Supplier 1=Digi-Key
SJ1 SJ2 SJ3 SJ4 SJ5: library part SJ_2S_NO, "Solder Jumper, NO", Component Group="PCB Feature", Component Type="Standard (No BOM)", Mounting Technology=COPPER, Part Number=SJ_2S_NO, Pin Count=2
SW1: library part CMP-08827-000045-1, "SWITCH SLIDE DIP SPST 25MA 24V", Current Rating=25mA, Max Operating Temperature=70°C, Max Voltage Rating (DC)=24V, Min Operating Temperature=-20°C, Package Quantity=4000, Actuator Type="Slide (Standard)", Depth=6.7mm, Electrical Life=1000Cycles, Length=0.448inch, Max Current Rating=25mA, Mechanical Life=1000Cycles, Mount="Surface Mount", Number of Positions=8, Orientation=Straight, Packaging="Tape and Reel", Pitch=0.05inch, Radiation Hardening=No, Series=A6H, Termination="Gull Wing", Throw Configuration=SPST, Voltage Rating (DC)=24V, Washable=No
U1: library part RPI_AMETHYST-7X7, Part Reference=U1, PCB Footprint=rpi-amethyst-7x7qfn
U2: "Regulator, Adj, LDO, 1A", Manufacture 1="Diodes Inc", Supplier Part Number 1=AP7361C-Y5-13DICT-ND, Component Group="Analog IC", Component Type=Standard, Manufacture Part Number 1=AP7361C-Y5-13, Part Number=AP7361C-Y5-13, Pin Count=5, PP Material Stack=0, PP Rotation=0, PP Rotation1=0, Supplier 1=Digi-Key
U3: library part CMP-78876-000009-2, "IC FLASH 16MBIT SPI/QUAD 8SOIC", Ambient Temperature Range High=85°C, Max Supply Voltage=3.6V, Min Operating Temperature=-40°C, Min Supply Voltage=2.7V, Access Time=5ms, Height=1.75mm, Interface=SPI, Max Operating Temperature=85°C, Memory Size=2MB, Memory Type=FLASH, NexarPartId=75645707, RoHS=Non-Compliant, Schedule B="8542320070, 8542320070"

## Via types
v1: diameter 24, hole 12, Top Layer to Bottom Layer, tented both sides, 166 vias
v2: diameter 24, hole 12, Top Layer to Bottom Layer, 6 vias

## Nets (pads, with @x,y where several pads share a name; then routed paths per layer and width w, separated by ;. In a path a pad name is that pad's centre, name@x,y a point inside that pad or via, vN(x,y) a via of type N, cw(c..) or ccw(c..) an arc to the next point about the centre after c; other vN are vias at no path point)
ADC_AVDD: C18.1 R3.1 U1.44 | length 419.1
  Top Layer w6: U1.44@5197.32,2831.3 5271.3,2831.3 5310,2870 C18.1@5347.44,2870
  Top Layer w12: C18.1@5347.44,2870 5350,2872.56 5350,2893.67 5357.03,2900.7 5490.7,2900.7 5503.46,2913.46 R3.1@5503.46,2980
ADC_VREF: R3.2 R10.2 | length 65
  Top Layer w12: R3.2@5436.54,2980 R10.2@5436.54,3045
CLKIN: P1.B27 R6.2 | length 293.6
  Top Layer w6: P1.B27@4614.81,3986.98 4615,3986.79 4615,3824.7 4621,3818.7 4621,3801.3 4615,3795.3 R6.2@4615,3698.46
CLKOUT: P1.A29 R4.1 | length 3567.2
  Top Layer w6: v1(4540,3865) 4540,3678.37 4525.75,3664.12 4318.76,3664.12 4305,3650.36 4305,3255 4235,3185 4235,2195 4275,2155 5270,2155 5413.46,2298.46 R4.1@5413.46,2570
  Bottom Layer w6: P1.A29@4536.07,3986.98 4540,3983.05 v1(4540,3865)
CS: P1.B26 R18.1 | length 1681.2
  Top Layer w6: v1(4362.25,2546.71) 4361.69,2546.71 4345,2563.4 4345,2630.3 4332,2643.3 4332,2828.3 4324,2836.3 4324,2853.7 4332,2861.7 4332,3022.91 4440,3130.91 4440,3360 4521,3441 4596,3441 4654.18,3499.18 4654.18,3836.13 4649,3841.3 4649,3858.7 4654.18,3863.87 P1.B26@4654.18,3986.98
  Bottom Layer w6: v1(4362.25,2546.71) 4399.59,2546.71 R18.1@4401.3,2545
CWIO1_TX: P1.B16 U1.18 | length 1933.8
  Top Layer w6: v1(4900,2490) 4922.28,2490 4927.28,2485 4944.7,2485 4981.77,2522.07 U1.18@4981.77,2600 ; P1.B16@5047.88,3986.98 5047.88,3877.58 5044,3873.7 5044,3856.3 5047.88,3852.42 5047.88,3760.76 v1(5049.11,3759.53)
  Layer 2 w6: v1(4900,2490) 4900,2494.3 4887.3,2507 4887.3,2605 4908.41,2626.11 4908.41,2887.39 4929.53,2908.5 4929.53,3350.25 4929.65,3350.37 4929.65,3584.65 4942,3597 4942,3619.25 4930,3631.25 4930,3716.97 4902,3744.97 4902,3766.7 4945.3,3810 5030,3810 5049.11,3790.89 v1(5049.11,3759.53)
CWIO2_RX: P1.B17 U1.19 | length 2174.7
  Top Layer w6: v1(4865,2460) 4935.3,2460 4946.3,2471 4947.67,2471 4993.77,2517.1 4993.77,2530.74 4997.52,2534.49 U1.19@4997.52,2600 ; P1.B17@5008.51,3986.98 5008.51,3782.73 v1(5010.93,3780.31)
  Layer 2 w6: v1(4865,2460) 4865,2462.21 4875.3,2472.51 4875.3,2640.3 4896.41,2661.41 4896.41,2892.36 4917.53,2913.47 4917.53,3577.99 4851.47,3644.04 4851.47,3733.14 4943.33,3825 5050,3825 5061.11,3813.89 5061.11,3781.79 5070.11,3772.79 5070.11,3750.83 5057.81,3738.53 5040.41,3738.53 5027.39,3751.55 5027.39,3763.85 v1(5010.93,3780.31)
CWIO3: P1.B18 U1.17 | length 1623.2
  Top Layer w6: v1(4940.23,2529.2) 4942.27,2531.23 4961.23,2531.23 4966.02,2536.02 U1.17@4966.02,2600 ; P1.B18@4969.14,3986.98 4969.14,3765.86 v1(4970,3765)
  Layer 2 w6: v1(4940.23,2529.2) 4923,2559.73 4923,2885 4941.53,2903.53 4941.53,3345.28 4954.74,3358.49 4954.74,3366.71 5028.53,3440.5 5028.53,3706.47 v1(4970,3765)
CWIO4: P1.B19 U1.27 | length 2275.8
  Top Layer w6: P1.B19@4929.77,3986.98 4929.77,3765.23 v1(4930,3765) ; v1(4955,3540) 4976,3519 5324,3519 v1(5380,3575) ; U1.27@5123.5,2600 5123.5,2506.5 v1(5150,2480)
  Layer 2 w6: v1(4930,3765) 4930,3762.75 4943.72,3749.02 4943.72,3634.49 4955,3623.22 v1(4955,3540) ; v1(5150,2480) 5179.7,2480 5324,2624.3 5324,2628.7 5336.3,2641 5340.7,2641 5380,2680.3 5380,2960.3 5374,2966.3 5374,2973.76 5373,2974.76 5373,3059.97 5380,3066.97 5380,3265.76 5362.53,3283.24 5362.53,3557.53 v1(5380,3575)
FILT_HP: C13.1 C20.1 C21.1 P1.A3 P1.B2 P1.B4 R5.1 SJ5.2 | length 3088.3
  Top Layer w15: P1.B4@5599.06,3986.98 5599.06,3690.94 v1(5615,3675) ; C13.1@5600,2707.56 C13.1@5603.94,2707.56 ; v1(5675,3605) 5710,3570 5710,3235 5670,3195 5670,2810 5685,2795 SJ5.2@5735,2795 C20.1@5735,2707.56 C21.1@5665,2707.56 C13.1@5603.94,2707.56 ; v1(5677.8,3762.2) P1.B2@5677.8,3986.98 ; v1(5740.76,3760) 5740,3759.24 5740,3710 5601,3571 5601,2949 5623.46,2926.54 R5.1@5623.46,2800 5623.46,2753.46 5611.2,2741.2 5611.2,2714.82 C13.1@5603.94,2707.56
  Bottom Layer w15: v1(5600,3870) 5610,3870 5632.15,3892.15 5632.15,3980.7 P1.A3@5638.43,3986.98 ; v1(5615,3675) 5616.72,3673.28 5616.72,3663.28 v1(5675,3605) ; v1(5677.8,3762.2) 5678.9,3761.1 5739.66,3761.1 v1(5740.76,3760)
FILTIN: C24.1 C25.1 C26.1 P1.B5 R14.1 SJ5.1 U2.5 | length 2373.3
  Top Layer w10: R14.1@5893.07,2515 5840,2515 5815,2540 5815,2795 5860,2840 C24.1@5898.39,2840
  Top Layer w20: P1.B5@5559.69,3986.98 5559.69,3695.31 v1(5560,3695) ; SJ5.1@5735,2827.43 5735,2865 5785,2915 C25.1@5898.39,2915 ; v1(5735,3665) 5975,3665 6020,3620 6020,3180 5907.83,3067.83 C26.1@5907.83,3000 5906.89,2999.06 5906.89,2765.87 U2.5@5905.94,2764.92
  Bottom Layer w20: v1(5560,3695) 5561.08,3695 5586.08,3720 5680,3720 v1(5735,3665)
GND: C1.2 C2.2 C3.2 C4.2 C5.2 C6.2 C7.2 C8.2 C9.2 C10.2 C11.2 C12.2 C13.2 C14.2 C15.2 C16.2 C17.2 C18.2 C19.2 C20.2 C21.2 C22.2 C23.2 C24.2 C25.2 C26.2 C27.2 C28.2 C29.2 C30.2 C31.2 C32.2 C33.2 C34.2 C35.2 C36.2 J1.1 J1.2 J1.3 J1.4 J1.A1-B12 J1.B1-A12 MH1.1 MH2.1 MH3.1 MH4.1 P1.A1 P1.A2 P1.A8 P1.A20 P1.A27 P1.A28 P1.B3 P1.B9 P1.B15 P1.B21 P1.B22 P7.8 P8.4 R13.2 R15.2 R22.2 R23.2 R24.2 U1.47 U1.61 U2.2 U3.4 | length 3780.7
  Top Layer w6: U1.47@5155,2873.62 5155,2930 v1(5160,2935)
  Top Layer w10: v1(4665,2670) 4670,2675 C8.2@4716.89,2675 ; v1(4700,2770) C4.2@4744.88,2770 ; v1(4719.47,2887.69) 4720.82,2886.34 4755.55,2886.34 C6.2@4756.89,2885 ; v1(4985,2372) C10.2@4985,2405 ; C12.2@5054.76,2399.88 5054.76,2370.24 v1(5055,2370) ; C11.2@5184.76,2406.89 5184.76,2370.24 v1(5185,2370) ; C9.2@5382.87,2670 v1(5420,2670) ; C17.2@5393.11,2930 v1(5445,2930) ; C7.2@5402.32,2740 v1(5440,2740) ; C18.2@5402.56,2870 v1(5445,2870)
  Top Layer w15: v1(4875,3120) C14.2@4910,3120 ; v1(4884.53,3055) C16.2@4926.89,3055 ; v1(5160,3100) 5165.12,3094.88 C19.2@5165.12,3060 ; P1.B9@5402.21,3986.98 5402.21,3852.21 v1(5404.42,3850) ; C15.2@5422.56,3120 v1(5455,3120) ; P1.B3@5638.43,3986.98 5638.43,3856.57 v1(5640,3855)
  Top Layer w20: v1(3860,3650) R22.2@3901.54,3650 ; J1.B1-A12@3881.34,3234.02 3935.98,3234.02 v1(3955,3215) ; J1.A1-B12@3881.34,3485.98 3950.98,3485.98 v1(3970,3505) ; v1(3985,3045) C28.2@3985,3095 ; R23.2@4040,3853.46 v2(4040,3900) ; C35.2@4153.11,2450 v1(4195,2450) ; v2(4160,3900) 4165,3895 R24.2@4165,3853.46 ; C30.2@4265,3573.11 v1(4265,3615) ; v1(4555,3370) C3.2@4600,3370 ; C5.2@4665,3355 4700,3390 4700,3399 v1(4701,3400) ; C29.2@4715,2413.11 v1(4715,2450) ; C32.2@4725,3113.11 v1(4725,3155) ; v1(4790,3860) 4811.66,3881.66 P1.B22@4811.66,3986.98 ; v1(4835,3865) 4851.03,3881.03 P1.B21@4851.03,3986.98 ; C33.2@4933.11,3455 v1(4970,3455) ; v1(5065,3865) 5083.47,3883.47 5083.47,3983.2 P1.B15@5087.25,3986.98 ; v1(5225.31,3100.77) 5225.31,3086.18 5233.03,3078.46 R13.2@5235,3078.46 ; C34.2@5348.11,2450 v1(5385,2450) ; C31.2@5520,3608.11 v1(5520,3650) ; v1(5860,3190) C1.2@5860,3230 ; v1(5920,3185) 5925,3190 C2.2@5925,3236.89 ; C26.2@5944.06,3000 v1(5990,3000) ; C24.2@5953.5,2840 v1(5990,2840) ; C25.2@5953.5,2915 v1(5990,2915) ; v1(5965,2585) U2.2@5965,2635 ; C36.2@6038.11,3745 v1(6080,3745) ; v1(6060,3005) 6060.94,3004.06 C23.2@6060.94,2966.22 ; R15.2@6115,2515 v1(6150,2515) ; v1(6140,3015) 6140.94,3014.06 C22.2@6140.94,2972.56
  Top Layer w25: C27.2@3705,2887.56 v1(3705,2940) ; U3.4@3964.76,2659.76 3964.99,2660 v1(4000,2660) ; C13.2@5600,2652.44 5602.74,2652.44 5605,2650.18 v1(5605,2610) ; C21.2@5665,2652.44 5665,2610 v1(5670,2605) ; v1(5735,2610) C20.2@5735,2652.44
  Bottom Layer w15: v1(5640,3855) 5637.8,3852.8 5677.8,3852.8 P1.A2@5677.8,3986.98
  Bottom Layer w20: v1(4565,3810) 4575.44,3820.44 P1.A28@4575.44,3986.98 ; v1(4600,3810) 4614.81,3824.81 P1.A27@4614.81,3986.98 ; v1(4885,3815) 4890.4,3820.4 P1.A20@4890.4,3986.98 ; P1.A8@5441.58,3986.98 5441.58,3883.42 v1(5465,3860) ; v1(5645,3800) 5717.17,3872.17 P1.A1@5717.17,3986.98
  other v1: 5017.2,2693.5 5060.51,2693.5 5103.82,2693.5 5017.2,2736.81 5060.51,2736.81 5103.82,2736.81 5017.2,2780.12 5060.51,2780.12 5103.82,2780.12
GPIO0_JTCK: P1.A9 U1.2 | length 1799.6
  Top Layer w6: v1(4816.47,3573.53) 4850.94,3608 5056.33,3608 5066.33,3618 5093.67,3618 5103.67,3608 5219.3,3608 5241.3,3630 5355,3630 5400,3675 v1(5400,3765) ; v1(4870,2855) 4893.7,2831.3 U1.2@4923.7,2831.3
  Layer 2 w6: v1(4816.47,3573.53) 4905.53,3484.47 4905.53,2925 4870,2889.47 v1(4870,2855)
  Bottom Layer w6: v1(5400,3765) 5425.42,3790.42 5425.42,3858.7 5402.21,3881.91 P1.A9@5402.21,3986.98
GPIO6: P1.A10 U1.9 | length 2099.4
  Top Layer w6: v1(4790,3515) 4794.87,3515 4803.4,3523.53 4803.98,3523.53 4860,3579.55 4877.58,3579.55 4878.11,3580.08 4915.38,3580.08 4931.3,3596 5061.3,3596 5071.3,3606 5088.7,3606 5098.7,3596 5224.27,3596 5246.27,3618 5363,3618 5430,3685 5430,3770 5414,3786 5364.51,3786 5363.44,3784.93 5363.44,3768.44 v1(5360,3765) ; v1(4800,2725) 4823,2702 4883.67,2702 4902.37,2720.7 4923.34,2720.7 U1.9@4923.7,2721.06
  Layer 2 w6: v1(4790,3515) 4793.44,3511.56 4803.44,3511.56 4815,3500 4815,3095 4782,3062 4782,2823.3 4800,2805.3 v1(4800,2725)
  Bottom Layer w6: v1(5360,3765) 5360,3769.87 5349,3780.87 5349,3867.39 5362.84,3881.22 P1.A10@5362.84,3986.98
GPIO7: P1.A11 U1.10 | length 1958.8
  Top Layer w6: v1(4770,2720) 4800,2690 4888.64,2690 4903.6,2704.96 4923.34,2704.96 U1.10@4923.7,2705.31 ; v1(4795.28,3544.53) 4795.28,3582.04 4833.25,3620 5051.36,3620 5061.36,3630 5098.64,3630 5108.64,3620 5195,3620 5217,3642 5287,3642 5330,3685 v1(5330,3750)
  Layer 2 w6: v1(4770,2720) 4770,3075 4793.53,3098.53 4793.53,3481.47 4769,3506 4769,3523.7 4781.3,3536 4781.88,3536 4790.41,3544.53 v1(4795.28,3544.53)
  Bottom Layer w6: P1.A11@5323.47,3986.98 5323.47,3756.53 v1(5330,3750)